# EAGLE board led-cpu-rev1 (EAGLE 6.2)
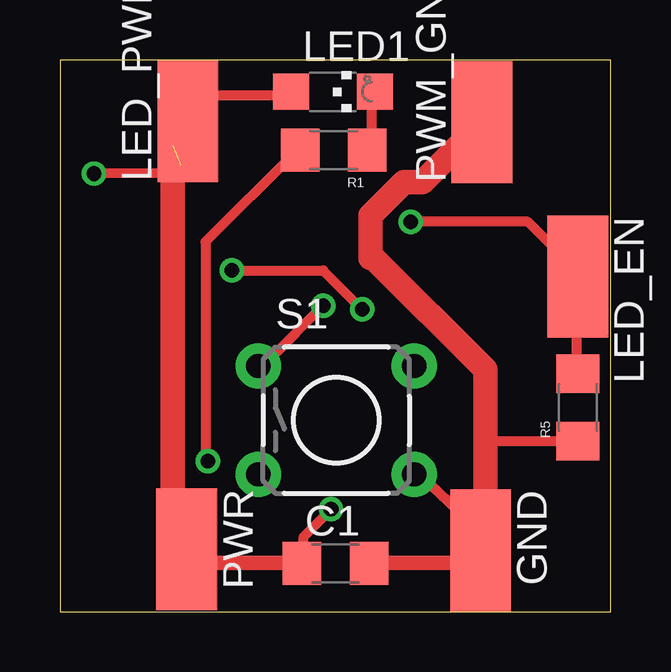
[diagram p0: board, top side]
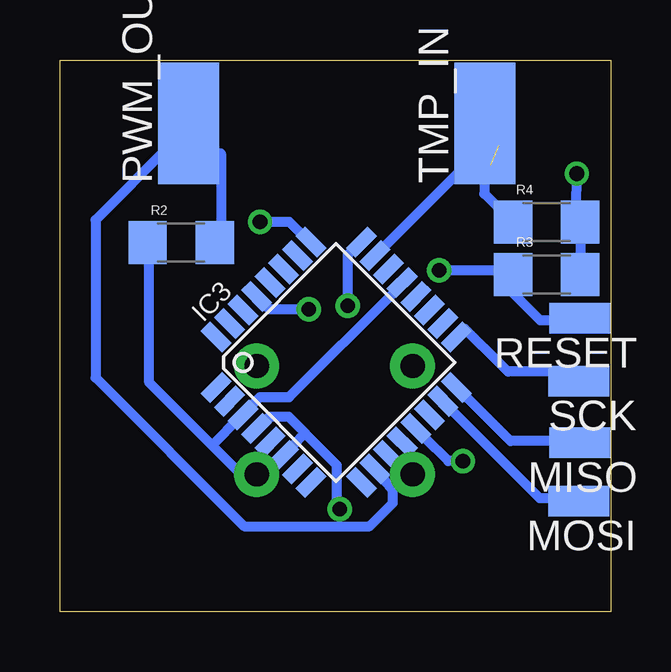
[diagram p1: board, bottom side, seen from below]

Size 22.97 x 23 mm. Coordinates in mm from the lower left corner, seen from the top.
Outline: 0,0 22.97,0 22.97,23 0,23 0,0
Copper layers (1*16): Top 0.035mm / dielectric 1.5mm / Bottom 0.035mm
Design rules: minimum track width 10mil, minimum drill 24mil, track to track 8mil, track to pad 8mil, pad to pad 8mil, via to via 8mil, smd to smd 8mil, copper to edge 40mil, drill to drill 8mil, minimum pad ring 10mil, minimum via ring 8mil, stop-mask expansion 4mil, vias tented up to drill 0mil, thermal gap 10mil
tKeepout: area 0,0 to 3.8,3.8; area 19.2,0 to 23,3.8; area 20,19 to 23,23; area 0,19 to 3,23
bKeepout: area 0,0 to 4,4; area 18.9,0 to 22.9,4; area 18.9,18.9 to 22.9,22.9; area 0,19 to 4,23

## Footprints (pad centres in the part's own frame; a part is rotated, then mirrored left to right if it is on the bottom)
C1206 = smd 1.6 x 1.8: 1 -1.4,0; 2 1.4,0
SMD2,54-5,08 = smd 2.54 x 5.08: 1 0,0
TQFP32-08 = smd 1.27 x 0.559: 1 -4.293,2.8; 2 -4.293,2; 3 -4.293,1.2; 4 -4.293,0.4; 5 -4.293,-0.4; 6 -4.293,-1.2; 7 -4.293,-2; 8 -4.293,-2.8; 17 4.293,-2.8; 18 4.293,-2; 19 4.293,-1.2; 20 4.293,-0.4; 21 4.293,0.4; 22 4.293,1.2; 23 4.293,2; 24 4.293,2.8 | smd 0.559 x 1.27: 9 -2.8,-4.293; 10 -2,-4.293; 11 -1.2,-4.293; 12 -0.4,-4.293; 13 0.4,-4.293; 14 1.2,-4.293; 15 2,-4.293; 16 2.8,-4.293; 25 2.8,4.293; 26 2,4.293; 27 1.2,4.293; 28 0.4,4.293; 29 -0.4,4.293; 30 -1.2,4.293; 31 -2,4.293; 32 -2.8,4.293
CHIPLED_1206 = smd 1.5 x 1.5: A 0,-1.75; C 0,1.75
SMD1,27-2,54 = smd 1.27 x 2.54: 1 0,0
1206 = smd 1.6 x 1.8: 1 -1.4,0; 2 1.4,0
TACTILE-PTH = drill 1.016 pad 1.88: 1 -3.251,2.261; 2 3.251,2.261; 3 -3.251,-2.261; 4 3.251,-2.261

## Placement (x,y rotation side)
C1  0.1uF  [C1206]  11.49,2.01 0 top
GND  GND  [SMD2,54-5,08]  17.54,2.56 180 top
IC3  MEGA8-AI  [TQFP32-08]  11.45,10.39 45 bottom
LED1  D1  [CHIPLED_1206]  11.38,21.67 270 top
LED_EN  [SMD2,54-5,08]  21.59,13.97 180 top
LED_PWR  [SMD2,54-5,08]  5.33,20.45 0 top
MISO  MISO  [SMD1,27-2,54]  1.29,7.04 90 bottom
MOSI  MOSI  [SMD1,27-2,54]  1.33,4.61 90 bottom
PWM_GND  GND  [SMD2,54-5,08]  17.6,20.4 0 top
PWM_OUT  [SMD2,54-5,08]  17.62,20.35 0 bottom
PWR  [SMD2,54-5,08]  5.29,2.6 180 top
R1  33  [1206]  11.42,19.23 180 top
R2  10k  [1206]  17.92,15.39 0 bottom
R3  10k  [1206]  2.68,14.05 0 bottom
R4  2k7  [1206]  2.68,16.25 0 bottom
R5  10k  [1206]  21.59,8.51 90 top
RESET  [SMD1,27-2,54]  1.3,12.23 90 bottom
S1  [TACTILE-PTH]  11.52,7.98 0 top
SCK  SCK  [SMD1,27-2,54]  1.33,9.61 90 bottom
TMP_IN  [SMD2,54-5,08]  5.26,20.35 0 bottom

## Library data of the parts
C1 = resistor
GND LED_EN LED_PWR MISO MOSI PWM_GND PWM_OUT PWR RESET SCK TMP_IN = wirepad
IC3 = atmel; MPN: ATMEGA8-16AU; OC_FARNELL: 9171371; OC_NEWARK: 73M8863
LED1 = led
R1-R5 S1 = SparkFun

## Nets
AVCC: IC3.18
GND: C1.2 GND.1 IC3.3 IC3.5 IC3.21 PWM_GND.1 R2.1 R5.1 S1.4
LED_EN: IC3.25 LED_EN.1 R5.2
MISO: IC3.16 MISO.1
MOSI: IC3.15 MOSI.1
N$1: LED1.C R1.1
PWM_OUT: IC3.10 PWM_OUT.1 R2.2
PWR_LED: IC3.13 R1.2
PWR_SW: IC3.24 S1.1
RESET: IC3.29 R3.1 RESET.1
SCK: IC3.17 SCK.1
TMP_IN: IC3.23 R4.1 TMP_IN.1
VCC: C1.1 IC3.4 IC3.6 LED1.A LED_PWR.1 PWR.1 R3.2 R4.2

## Tracks (layer width: path | path; a pad name or v marks a point on that pad's centre or on a via)
GND
  Top 0.254: 17.4,3.43 17.58,3.25 17.58,2.03 | 13.01,2.03 C1.2 | 15.01,5.69 S1.4 15.04,5.69 17.88,2.85 GND.1 | 17.48,20.27 17.48,20.32 PWM_GND.1
  Top 0.406: 15.01,5.69 17.4,3.43 | 17.73,7.11 R5.1
  Top 0.61: 17.58,2.03 13.01,2.03
  Top 1.016: 17.88,2.85 17.83,2.85 17.78,2.92 17.73,4.47 17.73,7.11 17.73,10.08 13.08,14.73 12.95,14.73 12.95,16.51 14.35,17.91 15.11,17.91 17.48,20.27
  Bottom 0.254: 19.25,15.24 R2.1 | 14.22,6.91 IC3.5 | 15.42,5.71 S1.4 | 15.44,8.13 IC3.3 15.04,8.53 | 8.94,13.41 IC3.21
  Bottom 0.406: 19.25,15.24 19.25,9.55 16.64,6.93 | 16.64,6.93 15.42,5.71 14.22,6.91 | 16.64,6.93 15.44,8.13 | 8.94,13.41 13.41,8.94 14.63,8.94 15.04,8.53
LED_EN  (via drill 0.61)
  Top 0.254: 21.54,10.57 R5.2 | 21.54,13.82 LED_EN.1 21.54,14.22
  Top 0.406: 21.54,13.82 21.54,10.57 | v14.63,16.26 19.51,16.26 21.54,14.22
  Bottom 0.254: 12.6,15.44 IC3.25
  Bottom 0.406: 12.6,15.44 13.41,16.26 v14.63,16.26
MISO
  Bottom 0.254: 6.1,8.94 IC3.16 | 1.63,7.16 MISO.1
  Bottom 0.406: 1.63,7.16 1.85,7.16 1.91,7.11 4.19,7.11 6.02,8.94 6.1,8.94
MOSI
  Bottom 0.254: 6.78,8.53 IC3.15 | 1.63,4.72 MOSI.1
  Bottom 0.406: 6.78,8.53 2.97,4.72 1.63,4.72
N$1
  Top 0.254: 13.01,21.54 LED1.C | 13.01,19.51 R1.1
  Top 0.406: 13.01,19.51 13.01,21.54
PWM_OUT
  Bottom 0.254: 18.44,19.38 17.48,20.32 PWM_OUT.1 18.44,19.38 | 18.44,19.38 16.26,19.1 | 16.26,15.39 R2.2 | 9.45,5.49 9.55,5.74 10.16,6.1 IC3.10
  Bottom 0.406: 16.26,19.1 16.26,15.39 | 9.45,5.49 9.09,5.08 9.09,4.52 10.06,3.56 15.29,3.56 21.49,9.75 21.49,16.33 18.44,19.38
PWR_LED  (via drill 0.61)
  Top 0.254: 9.75,19.1 R1.2
  Top 0.406: v6.17,6.27 6.07,6.4 6.07,15.42 9.75,19.1
  Bottom 0.254: 8.26,7.72 IC3.13
  Bottom 0.406: v6.17,6.27 6.78,6.27 7.75,7.24 8.26,7.72
PWR_SW  (via drill 0.61)
  Top 0.254: 8.53,10.57 S1.1
  Top 0.406: 8.53,10.57 8.74,10.57 8.76,10.54 v10.97,12.75
  Bottom 0.254: 10.57,15.29 IC3.24
  Bottom 0.406: 10.57,15.29 10.97,14.88 v10.97,12.75
RESET  (via drill 0.61)
  Top 0.406: v12.6,12.6 10.97,14.22 v7.16,14.22
  Bottom 0.254: 1.65,12.14 1.63,12.04 RESET.1 | 4.27,13.46 R3.1 4.42,14.22 | 14.63,13.01 IC3.29
  Bottom 0.406: 4.27,13.46 2.95,12.14 1.65,12.14 | 14.63,13.01 14.22,12.6 v12.6,12.6 | 4.42,14.22 v7.16,14.22
SCK
  Bottom 0.254: 6.1,11.79 IC3.17 | 1.63,10.01 SCK.1
  Bottom 0.406: 1.63,10.01 4.29,10.01 4.57,10.29 6.1,11.79
TMP_IN
  Bottom 0.254: 9.75,14.91 IC3.23 | 5.28,20.32 5.28,19.38 TMP_IN.1 5.28,20.32
  Bottom 0.406: R4.1 5.28,17.42 5.28,19.38 9.75,14.91
VCC  (via drill 0.61)  (1 unrouted)
  Top 0.254: 6.5,21.54 5.69,20.73 LED_PWR.1 5.28,20.73 | 9.35,21.54 LED1.A | 6.1,2.03 5.69,2.44 PWR.1 5.28,2.85 4.98,4.42 4.7,3.81 | 10.13,2.03 C1.1
  Top 0.406: 6.5,21.54 9.35,21.54 | 5.28,20.73 5.03,18.62 5.21,18.29 v1.42,18.26 | 10.13,2.03 10.16,2.03 10.16,3.12 v11.3,4.27
  Top 0.61: 6.1,2.03 10.13,2.03
  Top 1.016: 4.7,3.81 4.7,19.43
  Bottom 0.254: 1.27,13.99 R3.2 | R4.2 1.5,16.28 | 13.28,6.91 IC3.6 | 14.63,7.72 IC3.4 | v11.3,4.27 11.43,4.32 | 12.75,7.42 12.75,7.44
  Bottom 0.406: R4.2 1.27,13.99 | v1.42,18.26 1.5,16.28 | 13.28,6.91 12.75,7.44 13.44,8.13 14.22,8.13 14.63,7.72 | 11.43,4.32 11.43,6.1 12.75,7.42